# Allegro board JOYCAR_ARDUINO_BASIC_V0_1.brd
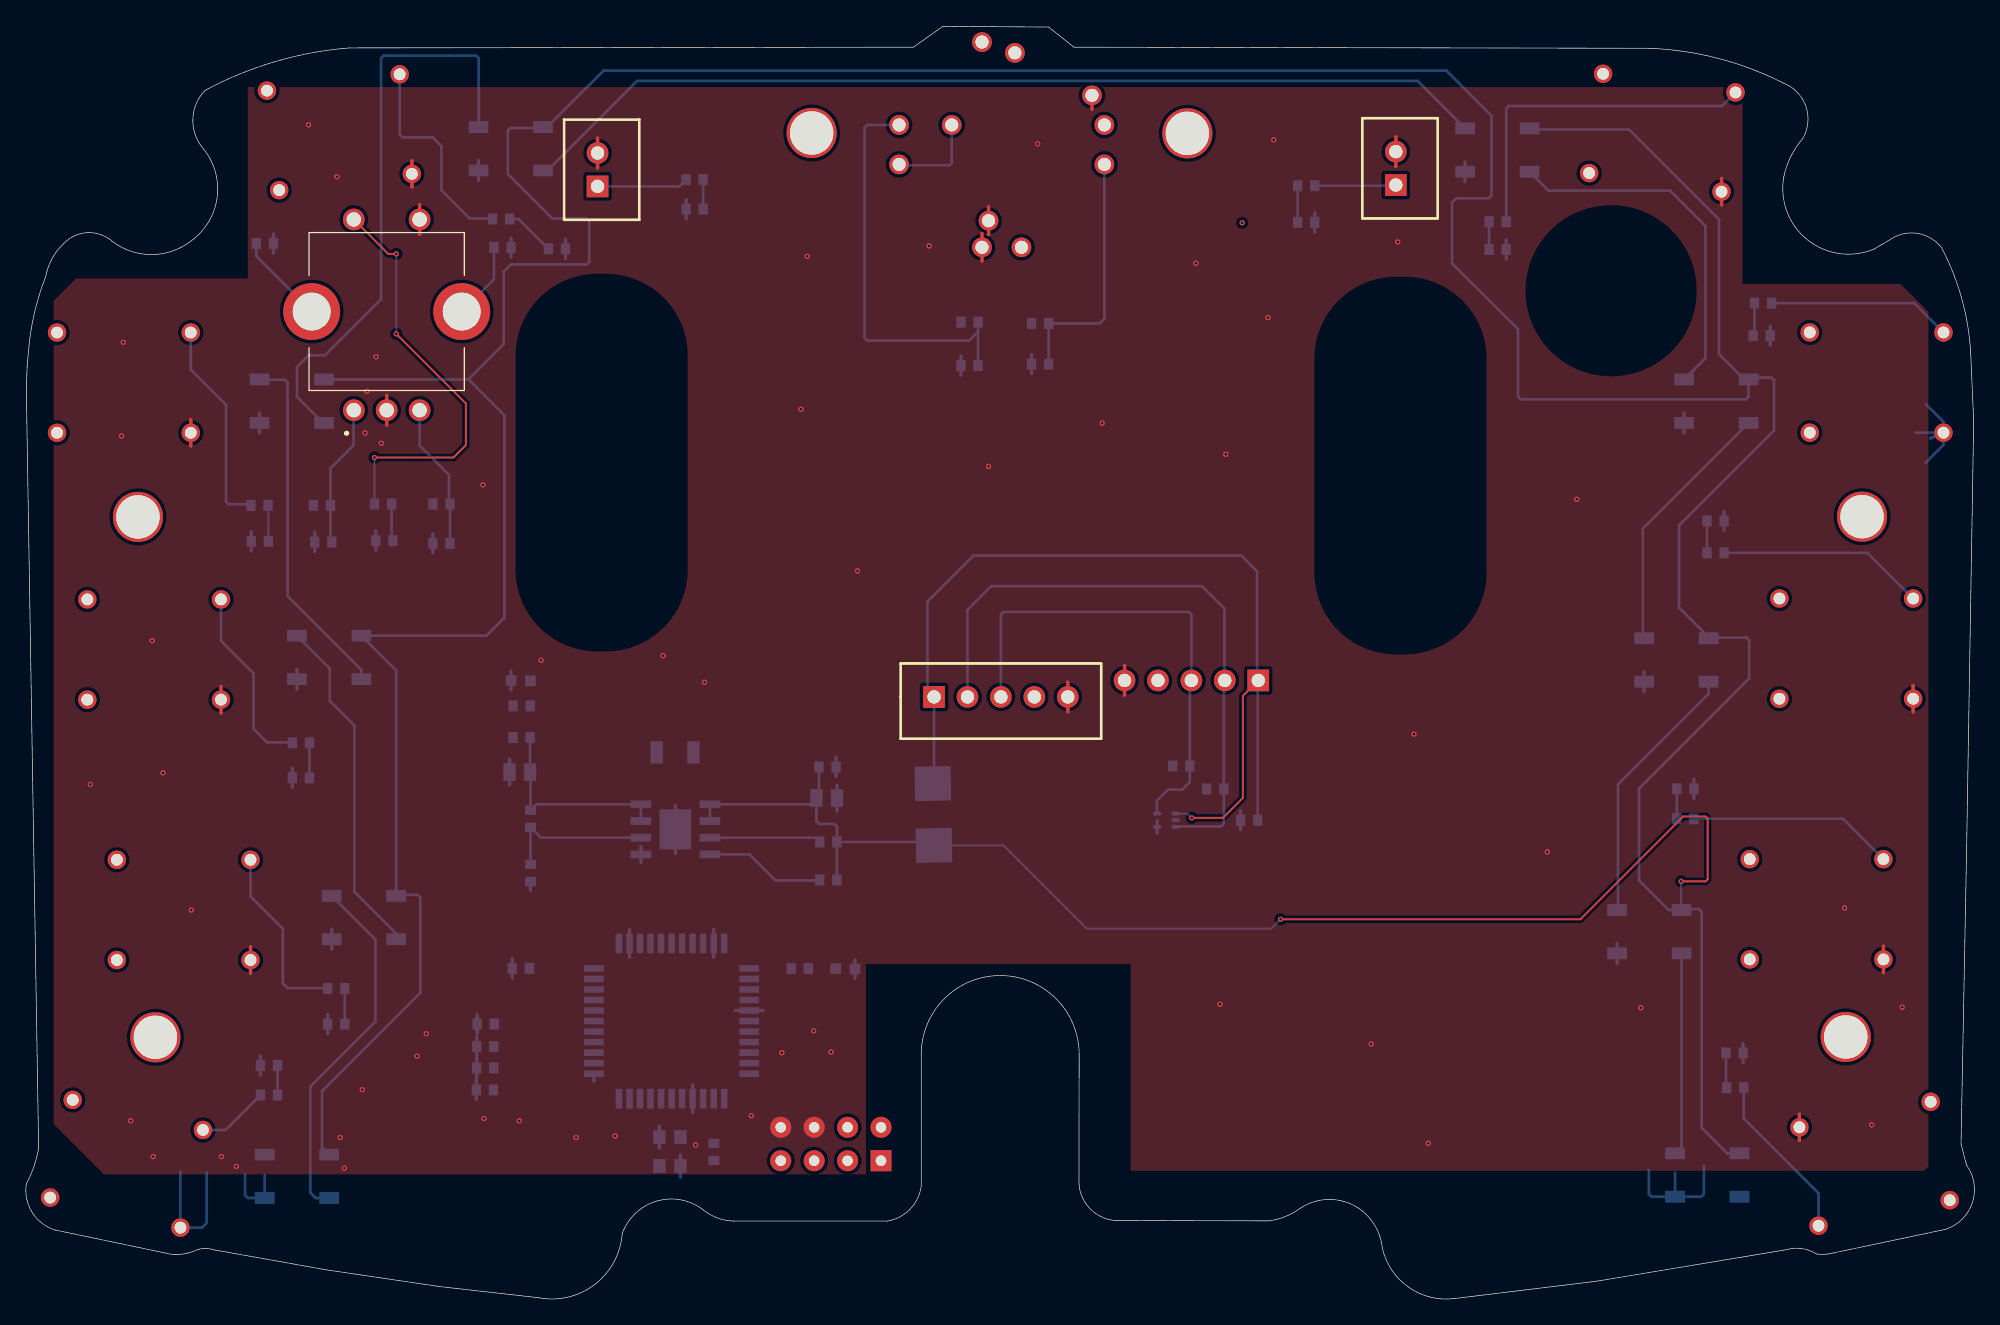
[diagram p0: board, top side]
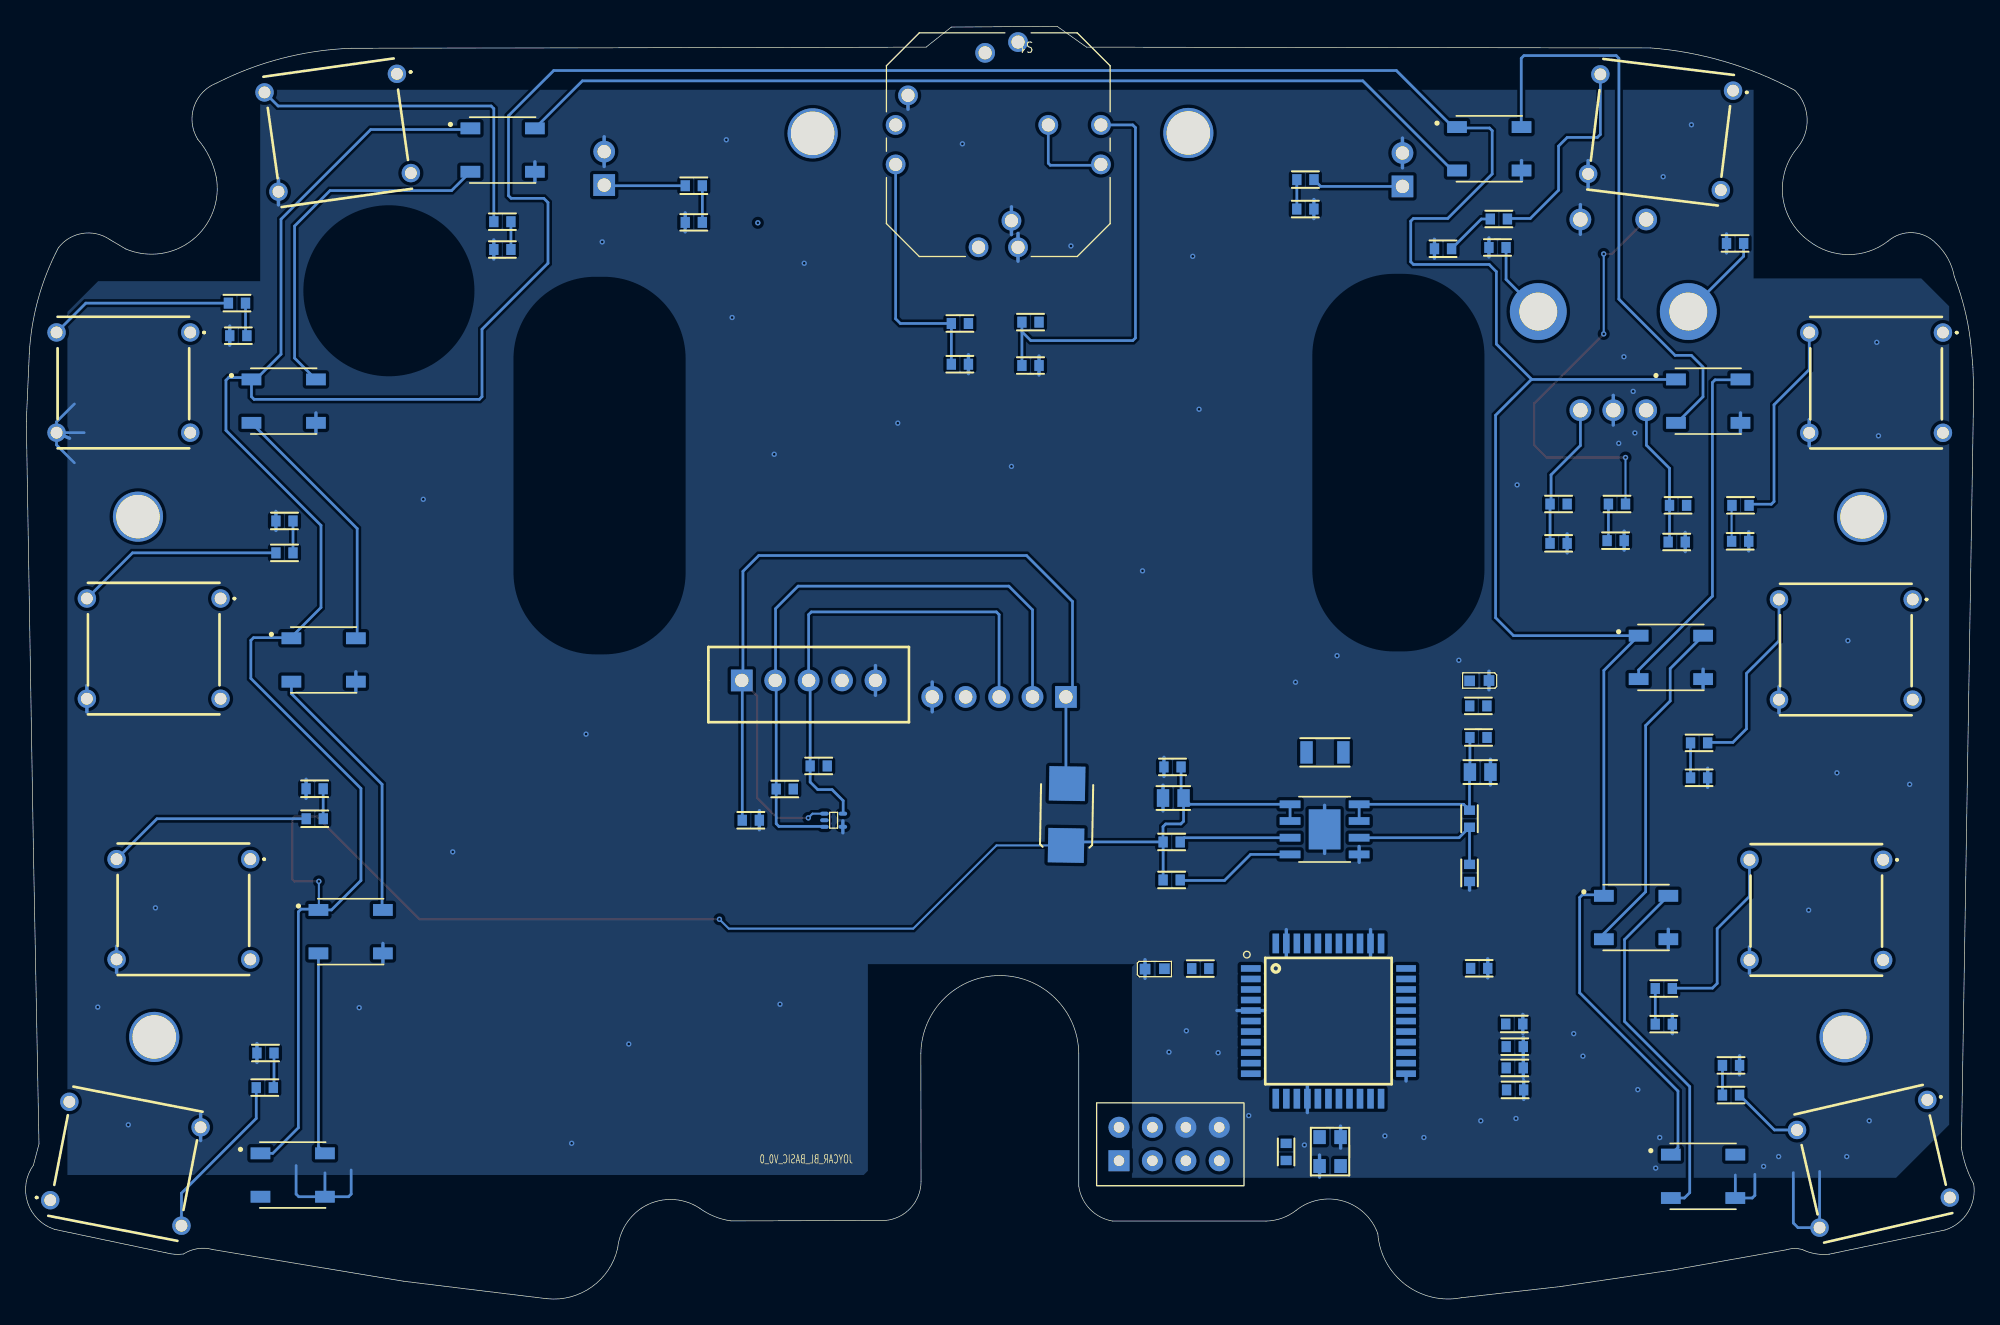
[diagram p1: board, bottom side, seen from below]

Outline 147.99 x 96.72 mm; copper layers: TOP, BOTTOM. Coordinates in mm from the lower left corner of the outline.
Outline path: 0,69.14 0.94,11.48 arc(0.59,10.06) 0,8.73 arc(0.44,6.57) 2.18,5.22 10.98,3.38 arc(12.01,3.41) 12.99,3.72 arc(13.6,3.82) 14.21,3.72 22.78,2.19 31.42,0.92 38.94,0.07 arc(43.2,1.09) 45.28,4.94 arc(47.92,7.42) 51.48,6.72 arc(52.56,6.12) 53.77,5.9 65.43,5.9 arc(67.16,6.81) 68.01,8.56 68.01,18.66 arc(74.02,24.56) 80.01,18.64 79.99,8.89 arc(80.79,6.88) 82.74,5.94 94.44,5.91 arc(95.69,6.25) 96.82,6.88 arc(99.03,7.54) 101.25,6.88 arc(102.48,5.57) 103.04,3.86 arc(105,0.91) 108.42,0 119.33,1.33 133.81,3.74 arc(134.96,3.8) 136.04,3.4 arc(136.73,3.38) 137.4,3.5 145.86,5.28 arc(147.89,7.31) 147.45,10.15 147.02,11.76 147.45,34.2 147.99,66.69 147.76,71.87 arc(147.09,75.99) 145.55,79.88 arc(143.74,80.97) 141.67,80.53 140.43,79.79 arc(135.37,80.48) 133.55,85.26 arc(134.08,86.79) 134.97,88.14 arc(135.24,90.63) 133.5,92.42 arc(128.55,94.29) 123.31,95.05 79.61,95.13 77.69,96.66 69.65,96.72 67.41,95.13 24.57,95.08 arc(18.91,94.04) 13.59,91.85 arc(12.66,89.71) 13.39,87.49 arc(14.51,83.77) 12.54,80.42 arc(9.53,79.37) 6.51,80.39 arc(4.65,81.03) 2.86,80.22 arc(1.96,79.07) 1.47,77.7 arc(0.6,74.86) 0.16,71.93 0.07,70.99 0.06,70.79 0,69.14

## Design rules (mm)
constraint set DEFAULT: min track width 0.152

## Placement (name value [footprint] x y rotation side)
C1  100n  [SMC0603]  34.88 17.54 180 bottom
C2  100n  [SMC0603]  34.88 19.16 180 bottom
C3  100n  [SMC0603]  34.91 20.88 180 bottom
C4  100n  [SMC0603]  34.85 15.87 180 bottom
C5  100n  [SMC0603]  92.93 36.37 180 bottom
C8  10u/6V3/CER  [SMC0805]  60.82 38.06 0 bottom
C9  100n  [SMC0603]  60.88 40.42 0 bottom
C10  10u/6V3/CER  [SMC0805]  37.5 40.03 180 bottom
C11  100n  [SMC0603]  27.21 57.62 180 bottom
C12  100n  [SMC0603]  22.57 57.52 180 bottom
C13  100n  [SMC0603]  31.54 57.41 180 bottom
C14  100n  [SMC0603]  77.04 71.03 180 bottom
C15  100n  [SMC0603]  71.68 70.93 180 bottom
C16  100n  [SMC0603]  126.08 38.76 0 bottom
C17  100n  [SMC0603]  129.81 18.67 0 bottom
C18  100n  [SMC0603]  50.79 82.83 180 bottom
C19  100n  [SMC0603]  131.88 73.2 0 bottom
C20  100n  [SMC0603]  128.37 59.12 0 bottom
C21  100n  [SMC0603]  97.26 81.81 0 bottom
C22  100n  [SMC0603]  111.81 79.75 0 bottom
C23  100n  [SMC0603]  40.33 79.81 0 bottom
C24  100n  [SMC0603]  20.87 39.59 180 bottom
C25  100n  [SMC0603]  17.75 57.57 180 bottom
C26  100n  [SMC0603]  23.55 20.87 180 bottom
C27  100n  [SMC0603]  18.44 17.73 180 bottom
D1  MBRA340T3  [SMDO214AA21]  68.89 39.15 91 bottom
D2  LED-RED  [LED_0603]  62.23 25.08 0 bottom
D4  LED-GREEN  [LED_0603]  37.57 46.97 180 bottom
FB1  MPZ1608S601A  [SMR0603]  37.63 42.66 180 bottom
FB2  MPZ1608S601A  [SMR0603]  18.13 80.22 180 bottom
FB3  MPZ1608S601A  [SMR0603]  36.19 79.91 180 bottom
J5  CON5  [CON5X140]  68.98 45.74 0 top
J6  CON2  [CON2X140]  43.41 84.55 90 top
J7  CON2  [CON2X140]  104.07 84.65 90 top
J8  CON5  [CON5X140]  93.62 47 180 bottom
J11  CON8  [HEADER_2_54MM_2X4]  64.95 10.49 180 bottom
NOREF  -  [unnamed]  88.23 88.58 0 top
NOREF#2  -  [unnamed]  9.81 19.87 0 top
NOREF#3  -  [unnamed]  59.68 88.61 0 top
NOREF#4  -  [unnamed]  139.5 59.44 0 top
NOREF#5  -  [unnamed]  8.48 59.43 0 top
NOREF#6  -  [unnamed]  138.26 19.9 0 top
R1  27R  [SMR0603]  90.35 38.74 180 bottom
R2  27R  [SMR0603]  87.77 40.5 180 bottom
R3  100k  [SMR0603]  60.95 34.72 180 bottom
R4  6k8  [SMR0603]  38.31 36.48 270 bottom
R5  10k  [SMR0603]  60.95 31.83 180 bottom
R6  2k2  [SMR0603]  38.31 32.36 270 bottom
R7  1k  [SMR0603]  27.11 60.41 180 bottom
R8  1.5k  [SMR0603]  22.46 60.3 180 bottom
R9  1.5k  [SMR0603]  31.54 60.41 180 bottom
R10  1.5k  [SMR0603]  77.04 74.13 180 bottom
R11  1.5k  [SMR0603]  71.68 74.23 180 bottom
R12  1k  [SMR0603]  129.86 16.04 0 bottom
R13  1k  [SMR0603]  126.07 36.48 0 bottom
R14  1k  [SMR0603]  50.78 85.06 180 bottom
R15  1k  [SMR0603]  128.37 56.69 0 bottom
R16  1k  [SMR0603]  131.98 75.68 0 bottom
R17  1k  [SMR0603]  97.26 84.6 0 bottom
R18  1k  [SMR0603]  111.81 81.87 0 bottom
R19  1k  [SMR0603]  36.08 82.07 180 bottom
R20  1k  [SMR0603]  17.72 60.3 180 bottom
R21  1k  [SMR0603]  20.87 42.25 180 bottom
R22  1k  [SMR0603]  23.55 23.58 180 bottom
R23  1k  [SMR0603]  18.44 15.48 180 bottom
R24  0R  [SMR1206]  49.3 41.53 180 bottom
R25  10k  [SMR0603]  52.25 11.16 270 bottom
R26  1k  [SMR0603]  37.58 25.11 0 bottom
R33  470R  [SMR0603]  58.77 25.09 0 bottom
R35  470R  [SMR0603]  37.64 45.06 0 bottom
S1  -  [RKJXT1F42001]  72.62 95.52 0 bottom
S2  -  [5GTH965]  146.17 7.49 11 bottom
S3  -  [5GTH965]  130.97 33.41 180 bottom
S4  -  [5GTH965]  133.22 53.22 180 bottom
S5  -  [5GTH965]  135.53 73.45 180 bottom
S6  -  [5GTH965]  119.82 93.11 172 bottom
S7  -  [5GTH965]  18.29 91.83 187 bottom
S8  -  [5GTH965]  2.34 73.44 180 bottom
S9  -  [5GTH965]  4.63 53.15 180 bottom
S10  -  [5GTH965]  6.88 33.36 180 bottom
S11  -  [5GTH965]  3.53 15.11 167 bottom
U2  TPD2E001  [TPD2E001DRLR]  86.64 36.37 180 bottom
U3  AP7165-SPG-13  [SOIC127P600X163-9N]  49.33 35.68 180 bottom
U4  PEC11H-4015F-S0016  [PEC11H4120FS0020]  24.89 67.54 0 top
U5  WS2812B-B  [LED_WS2812B-B]  20.56 9.3 180 bottom
U6  WS2812B-B  [LED_WS2812B-B]  25.65 28.98 180 bottom
U7  WS2812B-B  [LED_WS2812B-B]  23.01 48.75 180 bottom
U8  WS2812B-B  [LED_WS2812B-B]  20.17 68.22 180 bottom
U9  WS2812B-B  [LED_WS2812B-B]  36.81 87.41 180 bottom
U10  WS2812B-B  [LED_WS2812B-B]  111.79 87.31 180 bottom
U11  WS2812B-B  [LED_WS2812B-B]  128.43 68.22 180 bottom
U12  WS2812B-B  [LED_WS2812B-B]  125.39 48.55 180 bottom
U13  WS2812B-B  [LED_WS2812B-B]  123.34 27.9 180 bottom
U14  WS2812B-B  [LED_WS2812B-B]  127.74 9.4 180 bottom
U15  ATMEGA32U4-AU  [QFP80P1200X1200X120-44N]  49.03 21.1 180 bottom
Y1  TSX-3225 16.0000MF09Z-AC0  [XTALDFN4]  48.91 11.18 90 bottom

## Library data of the parts
C1-C5 C8-C27 = CAPACITOR NON-POL
D1 = 1N5819M/CYL
D2 D4 = LED
FB1-FB3 = INDUCTOR/SM
J5 J8 = CON5
J6 J7 = CON2
J11 = CON8
R1 R2 R7-R23 R25 R26 = RESISTOR/SM
R3 R5 R33 R35 = RESISTOR
R4 R6 R24 = RESISTOR/SM_0
S1 = RKJXT1F42001_0
S2-S11 = 5GTH965
U2 = MCP2551_0
U3 = AP7165-SPG-13_0
U4 = PEC11H-4015F-S0016
U5-U14 = WS2812B-B
U15 = ATMEGA32U4-AU
Y1 = CRYSTAL_3

## Footprints (pads in the part's own frame, mm; a bottom-side part is the same pattern mirrored in y, then rotated)
5GTH965
  round 1.4 hole 0.9: 1(0,0) 2(-10.16,0) 3(0,-7.62) 4(-10.16,-7.62)
CON2X140
  rect 1.651x1.651 hole 1.016: 1(0,0)
  round 1.651 hole 1.016: 2(2.54,0)
CON5X140
  rect 1.651x1.651 hole 1.016: 1(0,0)
  round 1.651 hole 1.016: 2(2.54,0) 3(5.08,0) 4(7.62,0) 5(10.16,0)
HEADER_2_54MM_2X4
  rect 1.6x1.6 hole 0.8: 1(0,0)
  round 1.6 hole 0.8: 2(2.54,0) 3(5.08,0) 4(7.62,0) 5(0,2.54) 6(2.54,2.54) 7(5.08,2.54) 8(7.62,2.54)
LED_0603
  rect 0.813x0.813 smd: 1(-0.737,0) 2(0.737,0.025)
LED_WS2812B-B
  rect 1.5x0.9 smd: 1(-2.45,1.65) 2(-2.45,-1.65) 3(2.45,-1.65) 4(2.45,1.65)
PEC11H4120FS0020
  round 1.65 hole 1.1: A1(0,0) B1(5,0) C1(2.5,0) S1(0,14.5) W1(5,14.5)
  round 4.32 hole 2.88: MH1(-3.2,7.5) MH2(8.2,7.5)
QFP80P1200X1200X120-44N
  rect 1.5x0.5 smd: 1(-5.9,4) 2(-5.9,3.2) 3(-5.9,2.4) 4(-5.9,1.6) 5(-5.9,0.8) 6(-5.9,0) 7(-5.9,-0.8) 8(-5.9,-1.6) 9(-5.9,-2.4) 10(-5.9,-3.2) 11(-5.9,-4) 23(5.9,-4) 24(5.9,-3.2) 25(5.9,-2.4) 26(5.9,-1.6) 27(5.9,-0.8) 28(5.9,0) 29(5.9,0.8) 30(5.9,1.6) 31(5.9,2.4) 32(5.9,3.2) 33(5.9,4)
  rect 0.5x1.5 smd: 12(-4,-5.9) 13(-3.2,-5.9) 14(-2.4,-5.9) 15(-1.6,-5.9) 16(-0.8,-5.9) 17(0,-5.9) 18(0.8,-5.9) 19(1.6,-5.9) 20(2.4,-5.9) 21(3.2,-5.9) 22(4,-5.9) 34(4,5.9) 35(3.2,5.9) 36(2.4,5.9) 37(1.6,5.9) 38(0.8,5.9) 39(0,5.9) 40(-0.8,5.9) 41(-1.6,5.9) 42(-2.4,5.9) 43(-3.2,5.9) 44(-4,5.9)
RKJXT1F42001
  round 1.5 hole 1: 1(0,0) 2(2.5,0.82) 3(8.36,4.05) 4(9.3,6.3) 5(9.3,9.3) 6(3,15.6) 7(0.5,13.58) 8(0,15.6) 9(-6.3,9.3) 10(-6.3,6.3) 11(-2.3,6.3)
SMC0603
  rect 0.711x0.838 smd: 1(-0.65,0) 2(0.65,0)
SMC0805
  rect 0.94x1.346 smd: 1(-0.78,0) 2(0.78,0)
SMDO214AA21
  rect 2.616x2.743 smd: 1(0,0) 2(-4.699,0)
SMR0603
  rect 0.711x0.838 smd: 1(-0.65,0) 2(0.65,0)
SMR1206
  rect 0.94x1.702 smd: 1(-1.4,0) 2(1.4,0)
SOIC127P600X163-9N
  rect 1.58x0.59 smd: 1(-2.625,1.905) 2(-2.625,0.635) 3(-2.625,-0.635) 4(-2.625,-1.905) 5(2.625,-1.905) 6(2.625,-0.635) 7(2.625,0.635) 8(2.625,1.905)
  rect 2.41x3.05 smd: 9(0,0)
TPD2E001DRLR
  oval 0.65x0.3 smd: 1(-0.7,0.5) 2(-0.7,0) 3(-0.7,-0.5) 4(0.7,-0.5) 5(0.7,0.5)
unnamed
  round 3.81 hole 3.302: MH(0,0)
XTALDFN4
  rect 1.06x0.95 smd: 1(-1.1,-0.8) 2(1.1,-0.8) 3(1.1,0.8) 4(-1.1,0.8)

## Nets
GND: C1.2 C2.2 C3.2 C4.2 C5.2 C8.2 C9.2 C10.2 C11.2 C12.2 C13.2 C14.2 C15.2 C16.2 C17.2 C18.2 C19.2 C20.2 C21.2 C22.2 C23.2 C24.2 C25.2 C26.2 C27.2 D2.2(CATHODE) D4.2(CATHODE) FB2.1 FB3.1 J5.5 J6.2 J7.2 J8.5 J11.7 J11.8 R6.2 R26.1 S1.3 S1.7 S1.8 S2.4 S3.4 S4.4 S5.4 S6.4 S7.4 S8.4 S9.4 S10.4 S11.4 U2.4 U3.5 U3.9 U4.C1 U4.W1(W) U5.3(VSS) U6.3(VSS) U7.3(VSS) U8.3(VSS) U9.3(VSS) U10.3(VSS) U11.3(VSS) U12.3(VSS) U13.3(VSS) U14.3(VSS) U15.5 U15.15 U15.23 U15.35 U15.43 Y1.2 Y1.4
VBUS: C8.1 C9.1 D1.2(CATHODE) R3.1 R5.1 R24.1 U3.1 U3.2 U5.1 U6.1 U7.1 U8.1 U9.1 U10.1 U11.1 U12.1 U13.1 U14.1 U15.2 U15.7
VCC: C1.1 C2.1 C3.1 FB1.2 J11.1 R8.2 R9.2 R10.2 R11.2 R25.2 R35.1 U15.14 U15.24 U15.34 U15.44
BTN_1: C17.1 R12.1 U15.36
BTN_2: C20.1 R15.1 U15.39
BTN_3: C22.1 R18.1 U15.20
BTN_4: C25.1 R20.1 U15.21
BTN_5: C16.1 R13.1 U15.25
BTN_6: C19.1 R16.1 U15.22
BTN_7: C23.1 R19.1 U15.26
BTN_8: C24.1 R21.1 U15.27
BTN_9: C26.1 R22.1 U15.29
BTN_10: C27.1 R23.1 U15.28
BTN_EX_1: C18.1 R14.1 U15.31
BTN_EX_2: C21.1 R17.1 U15.32
ENC_A: C12.1 R8.1 U4.A1 U15.12
ENC_B: C13.1 R9.1 U4.B1 U15.30
ENC_PRS: C11.1 R7.1 U15.40
LED_1: R33.1 U15.1
MISO: J11.4 U15.11
MOSI: J11.5 U15.10
NRESET: J11.2 R25.1 U15.13
RGB_DRV: U5.4 U15.41
SCK: J11.6 U15.9
SS: J11.3 U15.8
SW_A: S1.1
SW_B: S1.4
SW_C: S1.6
SW_D: S1.9 S1.11
SW_ENC_A: C15.1 R11.1 S1.10 U15.37
SW_ENC_B: C14.1 R10.1 S1.5 U15.38
SW_PUSH: S1.2(PUSH)
USB_DN: R2.2 U15.3
USB_DP: R1.2 U15.4
XTAL1: U15.17
XTAL2: U15.16(XTAL2) Y1.3
N401823: C10.1 FB1.1 R4.1 R24.2 U3.7 U3.8
N401965: R3.2 U3.3(POK)
N401969: R4.2 R6.1 U3.6
N9098414: C4.1 U15.42
N9102238: C5.1 D1.1 J5.1 J8.1 U2.1(VCC)
N9102368: J5.2 J8.2 R1.1 U2.3
N9102388: J5.3 J8.3 R2.1 U2.5
N9102952: R5.2 U3.4
N9103553: R7.2 U4.S1
N9104560: FB2.2 U4.MH1
N9104564: FB3.2 U4.MH2
N9110467: R12.2 S2.2(NO_2)
N9110797: R15.2 S4.2(NO_2)
N9111007: R18.2 S6.2(NO_2)
N9111223: R20.2 S8.2(NO_2)
N9111763: R13.2 S3.2(NO_2)
N9111863: R16.2 S5.2(NO_2)
N9111963: R19.2 S7.2(NO_2)
N9112063: R21.2 S9.2(NO_2)
N9113242: J6.1 R14.2
N9113415: J7.1 R17.2
N9115500: R22.2 S10.2(NO_2)
N9115600: R23.2 S11.2(NO_2)
N9123209: U5.2 U6.4
N9123213: U6.2 U7.4
N9123217: U7.2 U8.4
N9123221: U8.2 U9.4
N9123225: U9.2 U10.4
N9123250: U10.2 U11.4
N9123254: U11.2 U12.4
N9123258: U12.2 U13.4
N9123262: U13.2 U14.4
N9130987: U15.6
N9131137: Y1.1
N9131792: R26.2 U15.33
N9135415: U15.18
N9135427: U15.19
N91336631: D2.1 R33.2
N91340021: D4.1 R35.2

Pads without a net: J5 4; J8 4; NOREF MH; NOREF#2 MH; NOREF#3 MH; NOREF#4 MH; NOREF#5 MH; NOREF#6 MH; S2 1 3; S3 1 3; S4 1 3; S5 1 3; S6 1 3; S7 1 3; S8 1 3; S9 1 3; S10 1 3; S11 1 3; U2 2; U14 2

## Via types
v1: diameter 0.406, hole 0.203, TOP to BOTTOM, 63 vias

## Routing (per net, layer and track width the routed paths; a pad name or vN(x,y) marks a point on that pad's centre or on a via; arc(x,y) is an arc through that point)
GND: length 179.2
  TOP w0.254: 83.46,45.86 J8.5 83.46,48.13 ; 27.39,66.41 U4.C1 27.39,68.67 ; 143.38,44.6 S4.4 143.38,46.61 ; 73.12,80.89 S1.7 73.12,83 ; 14.79,44.53 S9.4 14.79,46.54 ; 141.13,24.79 S3.4 141.13,26.8 ; 29.89,83.17 U4.W1 29.89,80.91 ; 43.41,88.22 J6.2 43.41,85.96 ; 134.74,14.03 S2.4 134.74,12.02 ; 29.3,86.51 S7.4 29.3,84.5 ; 79.14,44.61 J5.5 79.14,46.87 ; 17.04,26.75 S10.4 17.04,24.74 ; 128.82,85.15 S6.4 128.82,83.14 ; 12.5,64.81 S8.4 12.5,66.82 ; 72.62,80.98 S1.8 72.62,78.87 ; 104.07,86.06 J7.2 104.07,88.32 ; 80.98,90.42 S1.3
  BOTTOM w0.203: S5.4 143.58,65.83 ; S5.4 145.69,64.9 144.33,63.54 ; S5.4 145.69,66.65 144.33,68.01 ; 16.63,9.45 16.63,7.85 16.83,7.65 U5.3 18.11,9.4 ; U14.3 127.28,7.75 127.48,7.95 127.48,10.13 ; U14.3 125.29,9.57 ; U14.3 123.5,7.75 123.3,7.95 123.3,9.78 ; 11.71,9.67 S11.4 13.35,5.4 13.71,5.76 13.71,9.58
  BOTTOM w0.254: 122.94,46.15 U12.3 122.94,47.66 ; 49.71,10.92 Y1.4 49.71,9.25 ; 14.79,44.53 S9.4 14.79,46.54 ; 36.93,24.39 R26.1 36.93,25.83 ; 52.23,25.95 U15.43 52.23,28.06 ; 80.98,90.42 S1.3 ; 29.89,83.17 U4.W1 29.89,80.91 ; 12.5,64.81 S8.4 12.5,66.82 ; 45.83,25.95 U15.35 45.83,28.06 ; 134.74,14.03 S2.4 134.74,12.02 ; 61.6,37.08 C8.2 61.6,39.04 ; 36.72,39.05 C10.2 36.72,41.01 ; 34.2,15.14 C4.2 34.2,16.59 ; 36.84,80.63 FB3.1 36.84,79.18 ; 17.04,24.74 S10.4 17.04,26.75 ; 34.23,18.27 C1.2 34.23,16.82 ; 46.7,34.37 U3.5 46.7,33.17 ; 40.98,80.53 C23.2 40.98,79.09 ; 73.12,80.89 S1.7 73.12,83 ; 26.56,56.9 C11.2 26.56,58.35 ; 61.53,41.14 C9.2 61.53,39.7 ; 21.92,56.79 C12.2 21.92,58.24 ; 143.38,44.6 S4.4 143.38,46.61 ; 17.72,65.82 U8.3 17.72,67.33 ; 55.99,21.9 U15.5 53.88,21.9 ; 22.9,20.14 C26.2 22.9,21.59 ; 23.2,26.57 U6.3 23.2,28.08 ; 109.34,84.91 U10.3 109.34,86.42 ; 79.14,44.61 J5.5 79.14,46.87 ; 128.82,83.14 S6.4 128.82,85.15 ; 76.39,71.76 C14.2 76.39,70.31 ; 92.28,35.64 C5.2 92.28,37.09 ; 50.63,16.26 U15.15 50.63,14.15 ; 34.36,86.51 U9.3 34.36,85 ; 85.94,36.32 U2.4 85.94,35.41 ; 126.73,38.03 C16.2 126.73,39.48 ; 129.02,58.39 C20.2 129.02,59.84 ; 43.13,16.55 U15.23 ; 29.3,84.5 S7.4 29.3,86.51 ; 18.78,79.49 FB2.1 18.78,80.94 ; 132.53,73.92 C19.2 132.53,72.48 ; 38.31,31.05 R6.2 ; 71.03,71.65 C15.2 71.03,70.21 ; 20.56,46.34 U7.3 20.56,47.85 ; 144.7,65.4 S5.4 ; 20.22,40.32 C24.2 20.22,38.87 ; 30.89,56.69 C13.2 30.89,58.14 ; 97.91,81.09 C21.2 97.91,82.54 ; 112.46,80.48 C22.2 112.46,79.03 ; 17.1,58.29 C25.2 17.1,56.85 ; 130.46,17.95 C17.2 130.46,19.4 ; 27.39,68.67 U4.C1 27.39,66.41 ; 34.23,18.43 C2.2 34.23,19.88 ; 36.83,47.7 D4.2 36.83,46.28 ; 141.13,24.79 S3.4 141.13,26.8 ; 34.26,21.6 C3.2 34.26,20.16 ; 17.79,18.46 C27.2 17.79,17.01 ; 50.14,82.1 C18.2 50.14,83.55 ; 72.62,78.87 S1.8 72.62,80.98 ; 83.46,45.86 J8.5 83.46,48.13 ; 104.07,88.32 J7.2 104.07,86.06 ; 43.41,85.96 J6.2 43.41,88.22 ; 125.98,65.82 U11.3 125.98,67.33 ; 48.11,13.12 Y1.2 48.11,11.45 ; 49.33,33.85 U3.9 49.33,37.51 ; 62.97,24.35 D2.2 62.97,25.77 ; 120.89,27 U13.3 120.89,25.49
  vias: v1(4.87,39.1) v1(7.24,65.59) v1(7.37,72.7) v1(7.94,13.52) v1(9.56,50.02) v1(9.65,10.8) v1(10.39,39.97) v1(12.54,29.53) v1(14.82,10.8) v1(15.96,10.06) v1(21.45,89.23) v1(23.6,85.29) v1(23.86,12.25) v1(24.17,9.92) v1(25.53,15.89) v1(25.75,65.81) v1(25.88,68.97) v1(26.58,71.6) v1(26.97,65.02) v1(29.69,18.43) v1(30.4,20.15) v1(34.69,61.86) v1(34.78,13.7) v1(37.46,13.52) v1(39.13,48.53) v1(41.78,12.25) v1(44.74,12.37) v1(48.38,48.88) v1(50.86,11.68) v1(51.54,46.86) v1(55.09,13.92) v1(57.42,18.7) v1(58.86,67.61) v1(59.35,79.23) v1(59.83,20.36) v1(61.15,18.74) v1(63.16,55.33) v1(68.6,80.02) v1(73.12,63.27) v1(76.85,87.79) v1(81.76,66.56) v1(88.87,78.71) v1(90.71,22.38) v1(91.15,64.19) v1(94.35,74.58) v1(94.79,88.09) v1(102.2,19.36) v1(104.22,80.33) v1(105.45,42.91) v1(106.55,11.81) v1(115.58,33.96) v1(117.82,60.76) v1(122.69,22.12) v1(138.17,29.71) v1(140.24,13.21) v1(142.56,22.16)
VBUS: length 448.6
  TOP w0.152: v1(95.31,28.84) 118.09,28.84 125.91,36.66 127.62,36.66 127.77,36.51 127.77,31.87 127.62,31.72 v1(125.75,31.72)
  BOTTOM w0.152: D1.2 74.26,34.46 80.59,28.13 94.6,28.13 v1(95.31,28.84) ; U13.1 125.75,29.58 v1(125.75,31.72)
  BOTTOM w0.203: R5.1 R3.1 ; R3.1 61.61,34.73 61.61,35.88 61.4,36.09 60.25,36.09 60.04,36.29 C8.1 ; R3.1 68.71,34.72 D1.2 ; U14.1 129.26,11.05 127.31,12.99 127.31,29.41 127.11,29.61 125.85,29.61 U13.1 124.8,29.55 122.56,31.79 122.56,38.78 130.92,47.15 130.92,50.04 130.72,50.25 127.89,50.25 U12.1 127.84,50.29 125.59,52.54 125.59,58.78 132.81,66.01 132.81,69.81 132.61,70.02 131.02,70.02 U11.1 ; U11.1 130.88,68.57 130.67,68.36 113.56,68.36 113.36,68.57 113.36,73.69 108.34,78.71 108.34,83.33 108.66,83.64 111.14,83.64 111.34,83.84 111.34,89.92 107.91,93.35 43.87,93.35 39.57,89.06 U9.1 39.19,88.99 36.79,88.99 36.59,88.78 36.59,85.49 39.97,82.11 42.58,82.11 42.78,81.91 42.78,78.82 42.58,78.61 36.82,78.61 36.27,78.07 36.27,72.57 33.59,69.89 ; U11.1 130.55,69.87 128.63,71.79 128.63,82.05 121.81,88.87 114.33,88.87 U10.1 ; 33.59,69.89 36.33,67.15 36.33,51.76 34.96,50.4 U7.1 28.1,47.75 U6.1 28.18,30.7 29.74,30.7 29.94,30.5 29.94,23.25 22.47,15.78 22.47,11.49 U5.1 ; 33.59,69.89 33.58,69.87 U8.1 ; U3.2 U3.1 59.57,37.58 C8.1 ; C8.1 60.23,38.25 C9.1
BTN_1: length 2.7
  BOTTOM w0.203: C17.1 129.16,16.1 R12.1
BTN_2: length 2.4
  BOTTOM w0.203: C20.1 R15.1
BTN_3: length 2.1
  BOTTOM w0.203: C22.1 111.16,79.75 R18.1
BTN_4: length 2.7
  BOTTOM w0.152: R20.1 18.4,60.28 C25.1
BTN_5: length 2.3
  BOTTOM w0.203: C16.1 125.43,36.49 R13.1
BTN_6: length 2.5
  BOTTOM w0.203: R16.1 131.33,73.3 C19.1
BTN_7: length 3.9
  BOTTOM w0.203: R19.1 37.41,82.07 C23.1
BTN_8: length 2.7
  BOTTOM w0.203: R21.1 C24.1
BTN_9: length 2.7
  BOTTOM w0.203: R22.1 24.2,20.87 C26.1
BTN_10: length 2.3
  BOTTOM w0.203: R23.1 19.09,15.48 C27.1
BTN_EX_1: length 2.2
  BOTTOM w0.203: R14.1 51.43,82.83 C18.1
BTN_EX_2: length 2.8
  BOTTOM w0.203: R17.1 C21.1
  vias: v1(92.4,81.78)
ENC_A: length 10.8
  BOTTOM w0.203: U4.A1 24.87,67.52 24.87,64.87 23.11,63.12 R8.1 23.11,57.62 C12.1
ENC_B: length 11.1
  BOTTOM w0.203: C13.1 R9.1 32.12,60.48 32.12,62.62 29.89,64.85 U4.B1
ENC_PRS: length 2.8
  BOTTOM w0.203: R7.1 27.76,57.72 C11.1
SW_D: length 7
  BOTTOM w0.203: S1.11 70.32,86.31 70.17,86.16 66.39,86.16 S1.9
SW_ENC_A: length 31
  BOTTOM w0.203: 72.33,73.51 71.65,72.83 63.9,72.83 63.7,73.03 63.7,89.02 63.9,89.22 S1.10 ; 72.33,73.51 R11.1 ; 72.33,73.51 C15.1
SW_ENC_B: length 19.2
  BOTTOM w0.203: S1.5 81.92,74.49 81.56,74.13 R10.1 C14.1
N401823: length 15.4
  BOTTOM w0.203: FB1.1 38.28,40.03 C10.1 38.31,40 R4.1 38.76,37.58 U3.8 U3.7
N401965: length 8.5
  BOTTOM w0.203: R3.2 59.97,35.04 U3.3
N401969: length 11.5
  BOTTOM w0.203: R6.1 38.31,35.83 R4.2 39.11,35.04 U3.6
N9102238: length 75.5
  TOP w0.152: v1(88.56,36.55) 90.93,36.55 92.45,38.07 92.45,45.83 J8.1
  BOTTOM w0.152: U2.1 88.24,36.87 v1(88.56,36.55)
  BOTTOM w0.203: D1.1 68.98,39.25 J5.1 68.78,45.74 68.48,46.04 68.48,53 71.98,56.49 92.32,56.49 93.53,55.29 93.53,47.08 J8.1 93.58,46.96 C5.1
N9102368: length 47.8
  BOTTOM w0.203: J5.2 71.52,52.36 73.32,54.16 89.34,54.16 91.05,52.45 91.05,47.02 J8.2 91,46.92 R1.1 91,36.1 90.8,35.9 87.37,35.9 U2.3
N9102388: length 37.8
  BOTTOM w0.203: U2.5 85.91,36.89 85.91,37.85 86.75,38.7 87.84,38.7 88.42,39.28 R2.1 88.42,46.88 J8.3 88.54,52 88.33,52.2 74.27,52.2 74.06,52 J5.3
N9102952: length 9.2
  BOTTOM w0.203: U3.4 54.95,33.77 56.93,31.79 60.26,31.79 R5.2
N9103553: length 31.9
  TOP w0.152: U4.S1 27.51,79.42 v1(28.11,79.42) ; v1(26.46,63.94) 32.46,63.94 33.41,64.89 33.41,68.05 v1(28.11,73.34)
  BOTTOM w0.152: v1(28.11,73.34) v1(28.11,79.42) ; R7.2 v1(26.46,63.94)
N9104560: length 6.9
  BOTTOM w0.203: U4.MH1 17.48,79.24 FB2.2
N9104564: length 5.9
  BOTTOM w0.203: FB3.2 35.54,77.48 U4.MH2
N9110467: length 12.8
  BOTTOM w0.203: R12.2 130.51,13.7 136.2,8.02 136.2,5.55 S2.2
N9110797: length 15.8
  BOTTOM w0.203: S4.2 139.92,56.69 R15.2
N9111007: length 26.5
  BOTTOM w0.203: R18.2 112.46,90.46 112.66,90.66 128.85,90.66 S6.2
N9111223: length 16
  BOTTOM w0.203: S8.2 12.5,70.62 15.17,67.95 15.17,60.59 15.38,60.39 16.98,60.39 R20.2
N9111763: length 15.7
  BOTTOM w0.203: S3.2 138.06,36.48 R13.2
N9111863: length 14
  BOTTOM w0.203: S5.2 143.46,75.68 R16.2
N9111963: length 16.3
  BOTTOM w0.203: R19.2 35.4,82.11 33.7,82.11 31.55,84.26 31.55,87.61 30.89,88.27 28.59,88.27 28.37,88.5 S7.2
N9112063: length 14.3
  BOTTOM w0.203: R21.2 20.18,42.28 18.3,42.28 17.27,43.32 17.27,47.53 14.79,50 S9.2
N9113242: length 6.9
  BOTTOM w0.203: J6.1 49.62,84.55 R14.2
N9113415: length 6.2
  BOTTOM w0.203: J7.1 104.02,84.6 R17.2
N9115500: length 14
  BOTTOM w0.203: R22.2 22.87,23.61 19.85,23.61 19.49,23.96 19.49,28.12 17.04,30.58 S10.2
N9115600: length 5.5
  BOTTOM w0.203: R23.2 15.14,12.83 S11.2
N9123209: length 27.6
  BOTTOM w0.203: U6.4 26.53,27.3 26.53,21.07 21.58,16.12 21.58,8.06 21.99,7.65 U5.2
N9123213: length 26.2
  BOTTOM w0.203: U6.2 28.1,27.75 24.93,30.93 24.93,43.57 23.06,45.43 23.06,47.89 U7.4
N9123217: length 27.1
  BOTTOM w0.203: U7.2 25.46,47.79 19.85,53.4 19.85,69.64 19.65,69.85 17.75,69.85 U8.4
N9123221: length 44.8
  BOTTOM w0.203: U9.4 34.38,89.08 34.38,94.29 34.18,94.49 27.16,94.49 26.96,94.29 26.96,75.98 22.69,71.71 21.46,71.71 20.57,70.82 20.57,68.56 22.55,66.57 U8.2
N9123225: length 74.4
  BOTTOM w0.203: U9.2 39.61,85.76 46.42,92.57 105.73,92.57 U10.4
N9123250: length 27.4
  BOTTOM w0.203: U10.2 115.67,84.23 124.91,84.23 127.6,81.54 127.6,71.5 U11.4
N9123254: length 19.7
  BOTTOM w0.203: U11.2 122.84,58.54 122.84,50.3 U12.4
N9123258: length 20.2
  BOTTOM w0.203: U12.2 127.84,45.99 120.95,39.1 120.95,29.61 U13.4
N9123262: length 15.4
  BOTTOM w0.203: U14.4 125.79,11.54 U13.2

## Copper pours and planes (outline as drawn; the poured copper is in the pictures)
GND on TOP: 16.83,92.1 16.83,77.56 3.77,77.56 2.08,75.86 2.08,13.28 5.9,9.46 63.81,9.46 63.81,25.33 63.7,25.43 83.93,25.43 83.93,9.72 144.23,9.72 144.54,10.04 144.54,75.01 142.42,77.13 130.43,77.13 130.43,92.1
GND on BOTTOM: 16.73,91.89 16.73,77.56 3.99,77.56 1.86,75.43 1.86,13.22 5.9,9.19 63.97,9.19 63.97,25.22 63.76,25.43 84.03,25.43 84.03,9.72 84.35,9.4 144.86,9.4 144.86,75.01 142.53,77.35 142.53,77.35 130.21,77.35 130.21,91.89

## Text on the board
Ref Des/Silkscreen Bottom: JOYCAR_BL_BASIC_V0_0
